# EAGLE board Transmissor nano (EAGLE 9.6.2)
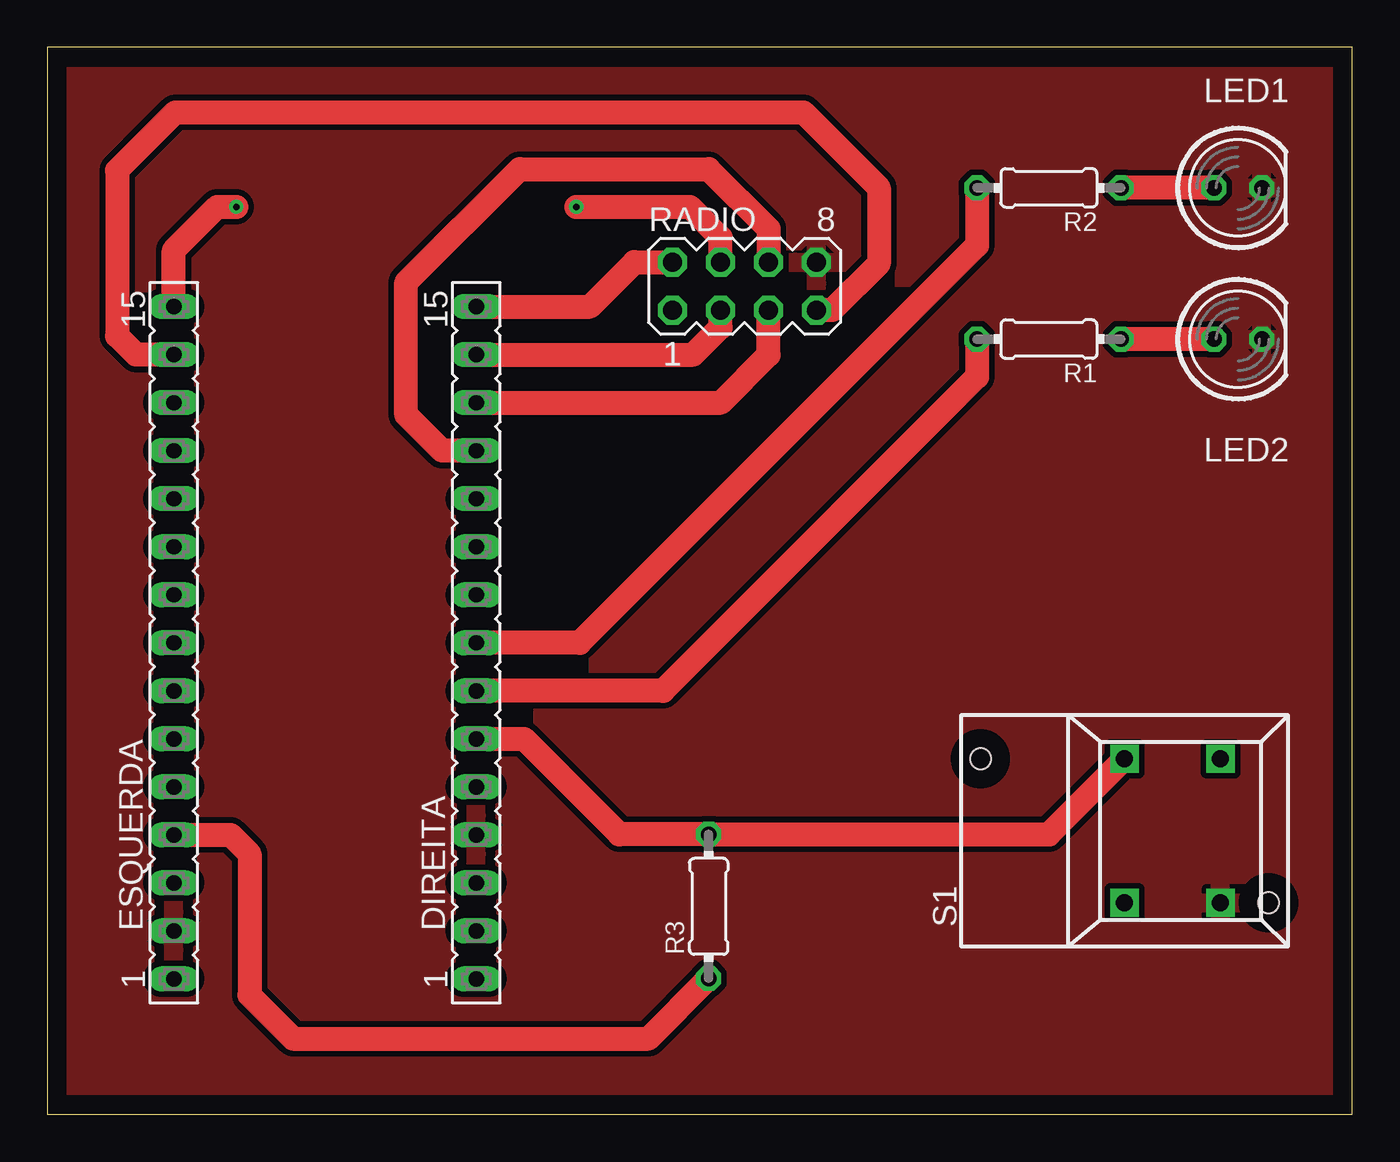
[diagram p0: board, top side]
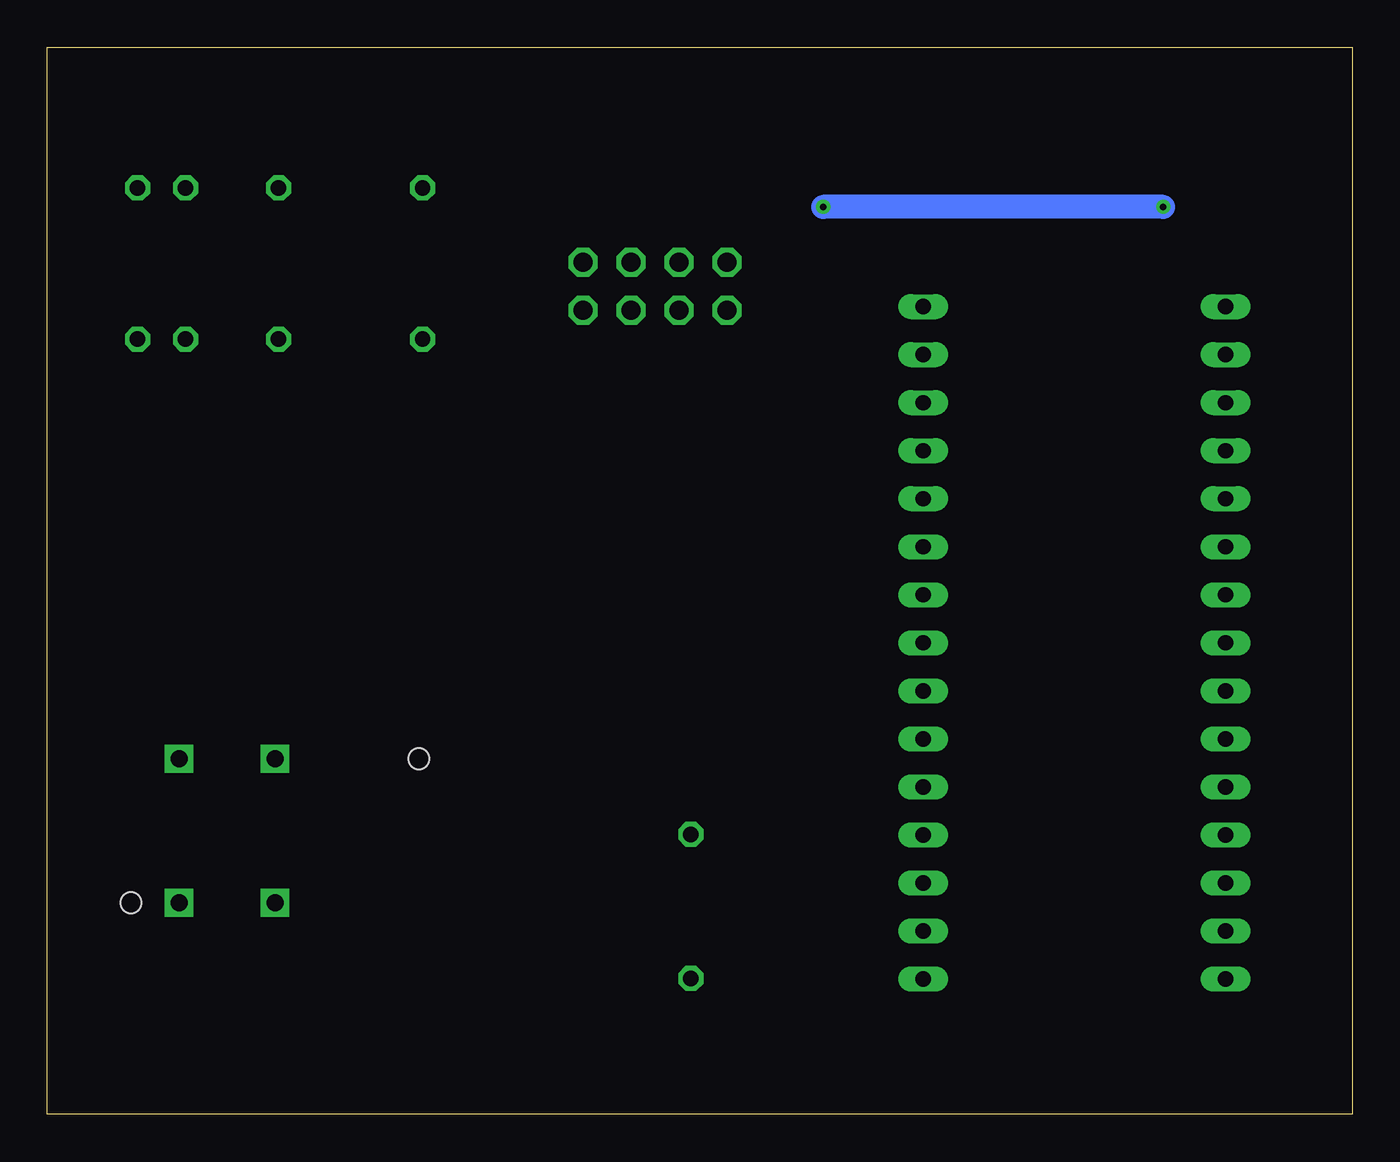
[diagram p1: board, bottom side, seen from below]

Size 69.05 x 56.44 mm. Coordinates in mm from the lower left corner, seen from the top.
Outline: 0,0 69.05,0 69.05,56.44 0,56.44 0,0
Copper layers (1*16): Top 0.035mm / dielectric 1.5mm / Bottom 0.035mm
Design rules "default *": minimum track width 6mil, minimum drill 0.35mm, track to track 12mil, track to pad 12mil, pad to pad 12mil, via to via 12mil, smd to smd 12mil, copper to edge 40mil, drill to drill 6mil, minimum pad ring 10mil, minimum via ring 8mil, stop-mask expansion 4mil, vias tented up to drill 0mil, thermal gap 10mil

## Footprints (pad centres in the part's own frame; a part is rotated, then mirrored left to right if it is on the bottom)
FE15 = drill 0.813 long: 1 -17.78,0; 2 -15.24,0; 3 -12.7,0; 4 -10.16,0; 5 -7.62,0; 6 -5.08,0; 7 -2.54,0; 8 0,0; 9 2.54,0; 10 5.08,0; 11 7.62,0; 12 10.16,0; 13 12.7,0; 14 15.24,0; 15 17.78,0
LED5MM = drill 0.813 octagon: A -1.27,0; K 1.27,0
0204/7 = drill 0.813 octagon: 1 -3.81,0; 2 3.81,0
MA04-2 = drill 1.016 octagon: 1 -3.81,-1.27; 2 -3.81,1.27; 3 -1.27,-1.27; 4 -1.27,1.27; 5 1.27,-1.27; 6 1.27,1.27; 7 3.81,-1.27; 8 3.81,1.27
5501 = drill 0.9 pad 1.5 square: 1A 0,3.81; 1B 0,-3.81; NC 5.08,-3.81; NO 5.08,3.81 | hole 1.1: -7.62,3.81; 7.62,-3.81

## Placement (x,y rotation side)
DIREITA  [FE15]  22.7,24.94 90 top
ESQUERDA  [FE15]  6.7,24.94 90 top
LED1  [LED5MM]  63,49 0 top
LED2  [LED5MM]  63,41 0 top
R1  [0204/7]  53,41 180 top
R2  [0204/7]  53,49 180 top
R3  [0204/7]  35,11 90 top
RADIO  [MA04-2]  36.89,43.8 0 top
S1  5501  [5501]  57,15 0 top

## Library data of the parts
DIREITA ESQUERDA = con-lsta; OC_FARNELL: unknown; OC_NEWARK: unknown
LED1 LED2 = led
R1-R3 = rcl; SPICEPREFIX: R
RADIO = con-lstb; OC_FARNELL: unknown; OC_NEWARK: unknown
S1 = switch

## Nets
3V3: ESQUERDA.14 RADIO.7
5V: ESQUERDA.4 R3.1
A0: ESQUERDA.12
A1: ESQUERDA.11
A2: ESQUERDA.10
A3: ESQUERDA.9
A4: ESQUERDA.8
A5: ESQUERDA.7
A6: ESQUERDA.6
A7: ESQUERDA.5
D2: DIREITA.5
D3: DIREITA.6 R3.2 S1.1A
D4: DIREITA.7 R1.2
D5: DIREITA.8 R2.2
D6: DIREITA.9
D7: DIREITA.10
D8: DIREITA.11
D9: DIREITA.12 RADIO.6
D10: DIREITA.13 RADIO.5
D11: DIREITA.14 RADIO.3
D12: DIREITA.15 RADIO.2
D13: ESQUERDA.15 RADIO.4
GND: DIREITA.4 ESQUERDA.2 LED1.K LED2.K RADIO.8 S1.NC
IRQ: RADIO.1
N$1: LED1.A R2.1
N$2: LED2.A R1.1
N$8: S1.1B
N$10: S1.NO
REF: ESQUERDA.13
RST1: ESQUERDA.3
RST2: DIREITA.3
RX0: DIREITA.2
TX1: DIREITA.1
V-IN: ESQUERDA.1

## Tracks (layer width: path | path; a pad name or v marks a point on that pad's centre or on a via)
3V3
  Top 1.27: RADIO.7 41.53,42.53 44,45 44,49 40,53 6.77,53 3.7,49.93 3.7,41.18 4.7,40.18 ESQUERDA.14
5V
  Top 1.27: ESQUERDA.4 9.7,14.78 10.7,13.78 10.7,6.3 13,4 31.81,4 R3.1
D3
  Top 1.27: DIREITA.6 25.22,19.86 30.27,14.81 R3.2 53,14.81 S1.1A
D4
  Top 1.27: R1.2 49.19,39 32.59,22.4 DIREITA.7
D5
  Top 1.27: R2.2 49.19,45.96 28.17,24.94 DIREITA.8
D9
  Top 1.27: DIREITA.12 20.9,35.1 19,37 19,44 25,50 35,50 38.16,46.84 RADIO.6
D10
  Top 1.27: DIREITA.13 35.64,37.64 38.16,40.16 RADIO.5
D11
  Top 1.27: DIREITA.14 34.18,40.18 35.62,41.62 RADIO.3
D12
  Top 1.27: DIREITA.15 28.72,42.72 31.07,45.07 RADIO.2
D13  (via drill 0.35)
  Top 1.27: RADIO.4 35.62,46.38 34,48 v28,48 | ESQUERDA.15 6.7,45.7 9,48 v10,48
  Bottom 1.27: v10,48 v28,48
GND
  pour Top: 1,55 1,1 68,1 68,55
N$1
  Top 1.27: LED1.A R2.1
N$2
  Top 1.27: LED2.A R1.1